# Altium PCB PCB_v0.2.pcbdoc
Units mil, origin at the board's own origin, x right, y up, seen from the top; angles counter-clockwise.
Board outline 2191.1 x 5080.87 mil, 2 copper layers (Top Layer, Bottom Layer); 17 components, 49 nets, 89 pads, 15 vias.
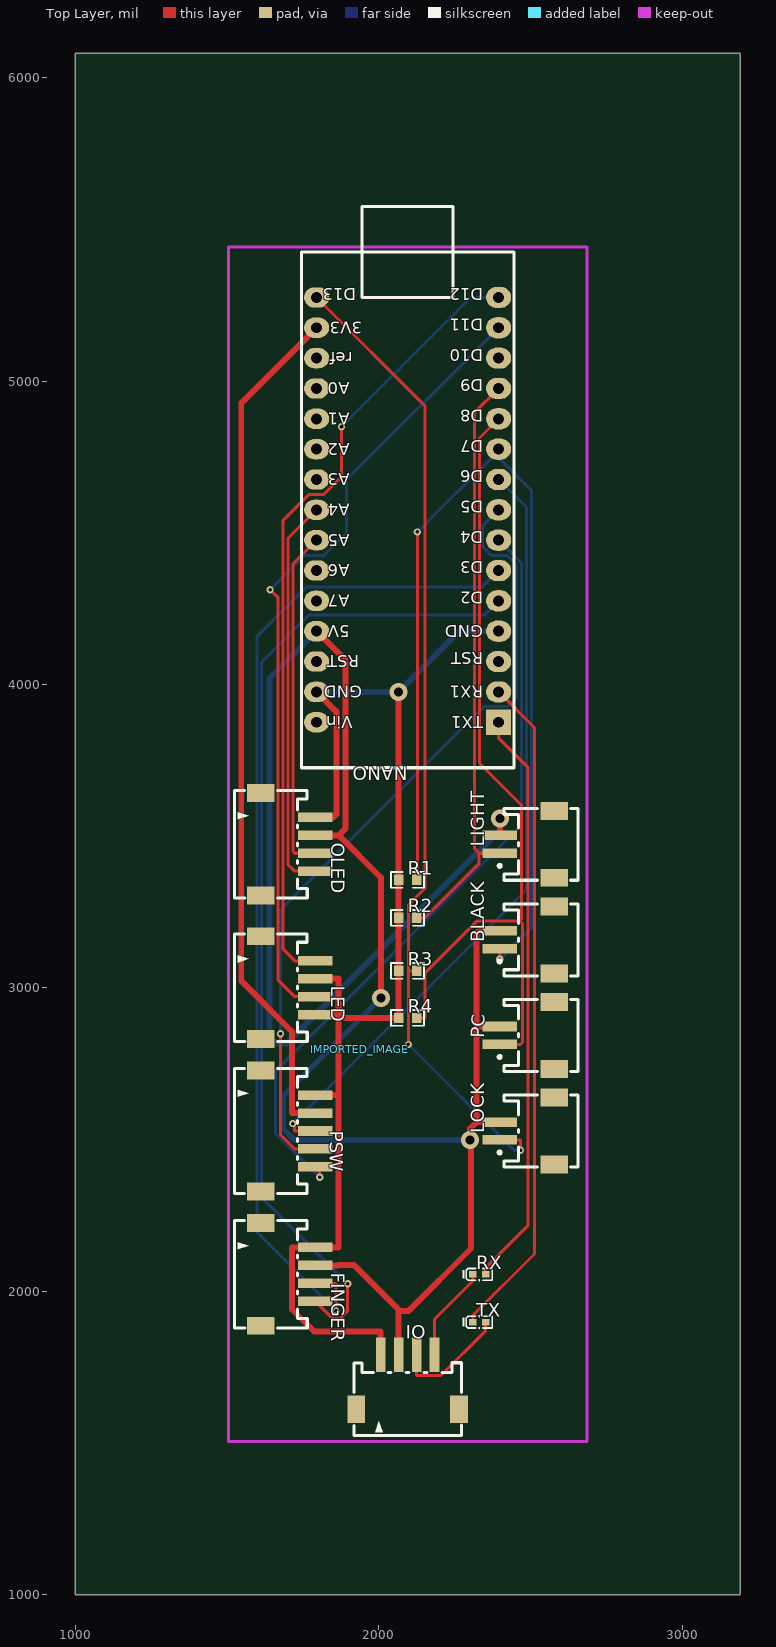
[diagram p0: Top Layer view]
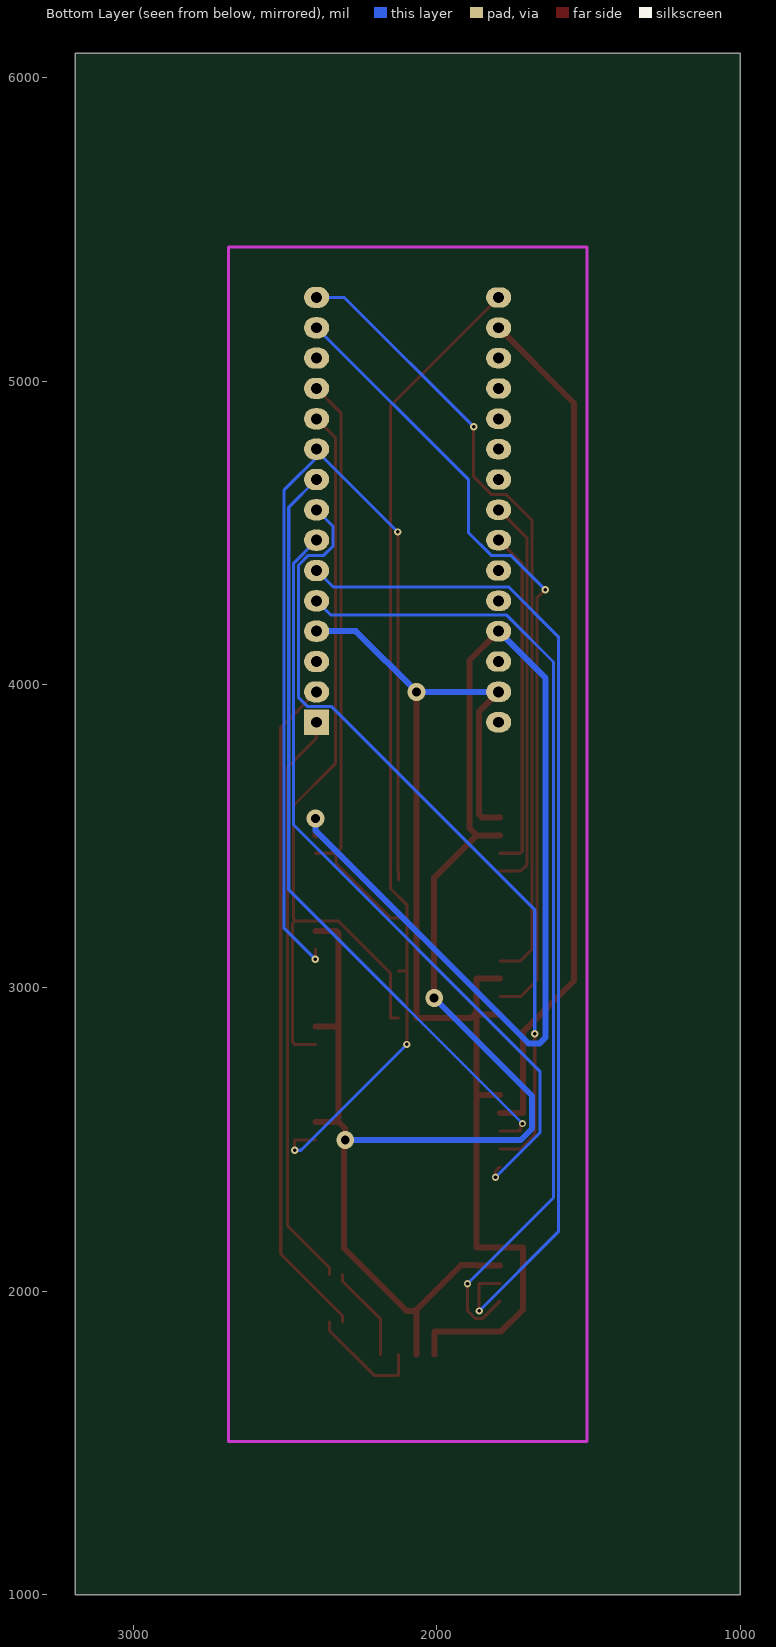
[diagram p1: Bottom Layer view, seen from below]

## Layer stack, top to bottom
Top Layer: signal copper (thickness not stored)
Dielectric: dielectric 12.6, FR-4, Dk 4.8
Bottom Layer: signal copper (thickness not stored)

## Board outline
3191.1,1000 1000,1000 1000,6080.87 3191.1,6080.87

## Components (designator, comment, footprint, x,y, rotation, side; value= is the part's Value field where it differs from the comment)
BLACK "ZH1.5-2P-WT 黑暗模式" CONN-SMD_ZH1.5-2P-WT 2489.25,3158.54 r90 top
FINGER "ZH1.5-4P-WT 指纹" CONN-TH_ZH1.5-4P-WT 1701.85,2056.18 r270 top
IMPORTED_IMAGE "IMPORTED_IMAGE" IMPORTED_IMAGE 1938.07,2798.2 r0 top
IO "ZH1.5-4P-WT IO" CONN-TH_ZH1.5-4P-WT 2095.55,1701.85 r0 top
LED "ZH1.5-4P-WT led" CONN-TH_ZH1.5-4P-WT 1701.85,3001.06 r270 top
LIGHT "ZH1.5-2P-WT 拨动开关" CONN-SMD_ZH1.5-2P-WT 2489.25,3473.5 r90 top
LOCK "ZH1.5-2P-WT 锁" CONN-SMD_ZH1.5-2P-WT 2489.25,2528.62 r90 top
NANO "ArduinoNano 蓝版" "ARDUINO NANO VINCENT" 2095.55,4575.87 r180 top
OLED "ZH1.5-4P-WT 0.96 OLED" CONN-TH_ZH1.5-4P-WT 1701.85,3473.5 r270 top
PC "ZH1.5-2P-WT 电脑" CONN-SMD_ZH1.5-2P-WT 2489.25,2843.58 r90 top
PSW "ZH1.5-5P-WT 密码" CONN-SMD_ZH1.5-5P-WT 1701.85,2528.62 r270 top
R1 "10K" R0603 2095.55,3356.26 r0 top
R2 "10K" R0603 2095.55,3231.26 r0 top
R3 "10K" R0603 2095.55,3056.26 r0 top
R4 "10K" R0603 2095.55,2901.26 r0 top
RX "TJ-S1005SW4TGLC6B-A5" LED0402-RD_BLUE 2331.77,2056.18 r0 top
TX "TJ-S1005SW4TGLC6B-A5" LED0402-RD_BLUE 2331.77,1898.7 r0 top

## Footprints (in the part's own frame and the unit in brackets; to place one, negate y for a bottom-side part, rotate by r counter-clockwise, add the part's x,y. Pads: shape width x height; smd on the part's side, far side on the other; paste and mask are expansions set on the pad)
"ARDUINO NANO VINCENT" [mm]
  rect 2.1x2.1 hole 0.914: 1(-7.62,17.78)
  oval 2.1x1.778 hole 0.914: 2(-7.62,15.24) 3(-7.62,12.7) 4(-7.62,10.16) 5(-7.62,7.62) 6(-7.62,5.08) 7(-7.62,2.54) 8(-7.62,0) 9(-7.62,-2.54) 10(-7.62,-5.08) 11(-7.62,-7.62) 12(-7.62,-10.16) 13(-7.62,-12.7) 14(-7.62,-15.24) 15(-7.62,-17.78)
  oval 2.1x1.7 hole 0.914: 16(7.62,-17.78) 17(7.62,-15.24) 18(7.62,-12.7) 19(7.62,-10.16) 20(7.62,-7.62) 21(7.62,-5.08) 22(7.62,-2.54) 23(7.62,0) 24(7.62,2.54) 25(7.62,5.08) 26(7.62,7.62) 27(7.62,10.16) 28(7.62,12.7) 29(7.62,15.24) 30(7.62,17.78)
  silkscreen extent -8.89,-25.4 8.89,21.59
CONN-SMD_ZH1.5-2P-WT [mm]
  rect 0.8x2.9 smd: 1(-0.75,2.275) 2(0.75,2.275)
  rect 1.5x2.3 smd: 3(-2.8,-2.275) 4(2.8,-2.275)
  silkscreen extent -3.01,-4.27 3,2.42
CONN-SMD_ZH1.5-5P-WT [mm]
  rect 0.8x2.9 smd: 1(-3,2.275) 2(-1.5,2.275) 3(0,2.275) 4(1.5,2.275) 5(3,2.275)
  rect 1.5x2.3 smd: 6(5.05,-2.275) 7(-5.05,-2.275)
  silkscreen extent -5.25,-4.48 5.25,1.57
CONN-TH_ZH1.5-4P-WT [mm]
  rect 0.8x2.9 smd: 1(-2.25,2.275) 2(-0.75,2.275) 3(0.75,2.275) 4(2.25,2.275)
  rect 1.5x2.3 smd: 5(4.3,-2.275) 6(-4.3,-2.275)
  silkscreen extent -4.5,-4.48 4.51,1.6
IMPORTED_IMAGE [mil]
LED0402-RD_BLUE [mm]
  rect 0.636x0.54 smd: 1(-0.538,0) 2(0.538,0)
  silkscreen extent -1.39,-0.54 1.09,0.54
R0603 [mil]
  rect 31.75x34.02 smd: 1(-29.65,0) 2(29.66,0)
  silkscreen extent -55,-26 55,26

## Via types
v1: diameter 24.02, hole 12.01, Top Layer to Bottom Layer, 11 vias
v2: diameter 59.06, hole 29.53, Top Layer to Bottom Layer, 4 vias

## Nets (pads, with @x,y where several pads share a name; then routed paths per layer and width w, separated by ;. In a path a pad name is that pad's centre, name@x,y a point inside that pad or via, vN(x,y) a via of type N, cw(c..) or ccw(c..) an arc to the next point about the centre after c; other vN are vias at no path point)
CN1_5: FINGER.5
CN1_6: FINGER.6
CN2_6: PSW.6
CN2_7: PSW.7
CN3_5: LED.5
CN3_6: LED.6
CN4_3: LOCK.3
CN4_4: LOCK.4
CN5_3: LIGHT.3
CN5_4: LIGHT.4
CN6_3: BLACK.3
CN6_4: BLACK.4
CN7_5: OLED.5
CN7_6: OLED.6
CN8_3: PC.3
CN8_4: PC.4
CN9_3: IO.3 TX.2 | length 385.2
  Top Layer w10: IO.3 2125.08,1723.26 2205.61,1723.26 2352.96,1870.61 TX.2
CN9_4: IO.4 RX.1 | length 317.1
  Top Layer w10: IO.4 2184.14,1908.04 2310.58,2034.48 RX.1
CN9_5: IO.5
CN9_6: IO.6
GND: FINGER.1 IO.1 LED.2 LED.4 NANO.4 NANO.29 OLED.1 PSW.1 R1.1 R2.1 R3.1 R4.1 | length 4343
  Top Layer w19.68: PSW.1 1868.2,2646.74 ; LED.4 1860.82,2912.48 ; LED.2 1868.2,3030.59 1868.2,2919.86 ; OLED.1 1850.34,3562.09 1860.82,3572.57 1860.82,3910.6 NANO.29 ; IO.1 2006.97,1868.2 1786.92,1868.2 1714.64,1940.48 1714.64,2144.77 FINGER.1 1868.2,2144.77 1868.2,2646.74 ; v2(2065.89,3975.87) R1.1 R2.1 R3.1 R4.1 2030.33,2901.26 1886.8,2901.26 1868.2,2919.86 ; 1860.82,2912.48 1868.2,2919.86 ; 1860.82,2912.48 1868.2,2912.48 1868.2,2646.74
  Bottom Layer w19.68: NANO.29 v2(2065.89,3975.87) 2265.89,4175.87 NANO.4
U1_1: NANO.1 RX.2 | length 1917
  Top Layer w10: RX.2 2352.96,2077.88 2491.69,2216.61 2491.69,3727.32 2395.55,3823.46 NANO.1
U1_2: NANO.2 TX.1 | length 2210.2
  Top Layer w10: TX.1 2310.58,1920.4 2513.65,2123.47 2513.65,3857.77 NANO.2
U1_3: NANO.3
U1_5: FINGER.4 NANO.5 | length 3261.5
  Top Layer w10: FINGER.4 1849.05,1909.97 1872.08,1909.97 1898.2,1936.09 v1(1898.2,2025.26)
  Bottom Layer w10: v1(1898.2,2025.26) 1614.76,2308.7 1614.76,4074.58 1768.74,4228.56 2348.24,4228.56 NANO.5
U1_6: FINGER.3 NANO.6 | length 3376.5
  Top Layer w10: FINGER.3 1859.58,2026.66 v1(1859.58,1935.65)
  Bottom Layer w10: v1(1859.58,1935.65) 1598.67,2196.56 1598.67,4157.65 1762.97,4321.95 2341.63,4321.95 NANO.6
U1_7: NANO.7 PSW.5 | length 2568.1
  Top Layer w10: PSW.5 1805.8,2396.14 v1(1805.8,2376.06)
  Bottom Layer w10: v1(1805.8,2376.06) 1659.77,2522.09 1659.77,2725.5 2471.19,3536.92 2471.19,4400.23 NANO.7
U1_8: NANO.8 PSW.4 | length 2661.7
  Top Layer w10: v1(1676.5,2849.52) 1676.5,2516.33 1723.26,2469.57 PSW.4
  Bottom Layer w10: v1(1676.5,2849.52) 1676.5,3257.47 2347.32,3928.29 2426.5,3928.29 2454.74,3956.53 2454.74,4393.91 2422.78,4425.87 2371.66,4425.87 2341.63,4455.9 2341.63,4521.95 NANO.8
U1_9: NANO.9 PSW.3 | length 2575
  Top Layer w10: v1(1717.03,2553.06) 1723.26,2546.83 1723.26,2528.63 PSW.3
  Bottom Layer w10: v1(1717.03,2553.06) 2487.28,3323.31 2487.28,4584.14 NANO.9
U1_10: BLACK.1 NANO.10 R1.2 | length 3323.7
  Top Layer w10: R1.2 2125.21,3384.34 2127.61,3386.74 v1(2127.61,4503.13) ; v1(2399.69,3094.39) BLACK.1
  Bottom Layer w10: v1(2127.61,4503.13) NANO.10@2383.95,4759.47 ; NANO.10 2383.95,4764.27 NANO.10@2383.95,4759.47 ; v1(2399.69,3094.39) 2503.37,3198.07 2503.37,4640.05 NANO.10@2383.95,4759.47
U1_11: NANO.11 PC.1 R4.2 | length 2781.6
  Top Layer w10: R4.2 2152.15,2901.26 2152.15,3048.3 2325.07,3221.22 2465.78,3221.22 ; NANO.11 2332.46,4812.78 2332.46,3740.31 2471.66,3601.11 2471.66,3227.1 2465.78,3221.22 ; PC.1 2467.85,2814.07 2474.31,2820.53 2474.31,3212.69 2465.78,3221.22
U1_12: LIGHT.1 NANO.12 R2.2 | length 1953.8
  Top Layer w10: R2.2 2152.15,3231.26 2331.53,3410.64 2331.53,3443.99 ; NANO.12 2315.5,4895.82 2315.5,3460.02 2331.53,3443.99 ; LIGHT.1 2331.53,3443.99
U1_13: NANO.13
U1_14: LED.3 NANO.14 | length 2656.1
  Top Layer w10: v1(1642.34,4312.89) 1669.01,4286.22 1669.01,3025.79 1723.26,2971.54 LED.3
  Bottom Layer w10: v1(1642.34,4312.89) 1755.32,4425.87 1820.33,4425.87 1894.31,4499.85 1894.31,4674.63 NANO.14
U1_15: LED.1 NANO.15 | length 2646.3
  Top Layer w10: LED.1 1723.26,3089.65 1685.5,3127.41 1685.5,4541.62 1769.75,4625.87 1818.64,4625.87 1877.8,4685.03 v1(1877.8,4849.51)
  Bottom Layer w10: v1(1877.8,4849.51) 2304.16,5275.87 NANO.15
U1_16: LOCK.1 NANO.16 R3.2 | length 3275
  Top Layer w10: NANO.16 2152.16,4919.26 2152.16,3328.18 2098.26,3274.28 2098.26,3056.26 ; v1(2098.26,2814.03) 2098.26,3056.26 ; R3.2 2098.26,3056.26 ; LOCK.1 2467.85,2499.1 v1(2467.85,2465.18)
  Bottom Layer w10: v1(2098.26,2814.03) 2447.11,2465.18 v1(2467.85,2465.18)
U1_18: NANO.18
U1_19: NANO.19
U1_20: NANO.20
U1_21: NANO.21
U1_22: NANO.22
U1_23: NANO.23 OLED.4 | length 1307
  Top Layer w10: OLED.4 1723.26,3384.92 1701.6,3406.58 1701.6,4481.92 NANO.23
U1_24: NANO.24 OLED.3 | length 1134.6
  Top Layer w10: OLED.3 1723.26,3443.98 1717.69,3449.55 1717.69,4398.01 NANO.24
U1_25: NANO.25
U1_26: NANO.26
U1_28: NANO.28
U1_30: NANO.30
VCC: BLACK.2 FINGER.2 IO.2 LIGHT.2 LOCK.2 NANO.27 OLED.2 PC.2 | length 7304.4
  Top Layer w19.68: FINGER.2 1868.2,2085.71 ; OLED.2 1868.2,3503.03 ; NANO.27 1891.57,4079.85 1891.57,3526.4 1868.2,3503.03 ; 1868.2,2086.26 1919.41,2086.26 2066.03,1939.64 IO.2 2066.03,1860.82 ; v2(2007.81,2967.11) 2007.81,3363.42 1868.2,3503.03 ; 2066.03,1935.94 2099.09,1935.94 2304.41,2141.26 2304.41,2494.93 v2(2301,2498.34) 2301,2536.24 2322.91,2558.15 ; LOCK.2@2399.69,2558.15 2322.91,2558.15 ; PC.2 2322.91,2873.12 ; BLACK.2 2330.3,3188.08 2322.91,3180.69 2322.91,2873.12 ; LIGHT.2 v2@2399.69,3558.55 ; 2322.91,2558.15 2322.91,2873.12
  Bottom Layer w19.68: NANO.27 1640.33,4020.65 1640.33,2837.58 1660.6,2817.31 1697.28,2817.31 2399.69,3519.72 v2@2399.69,3558.55 ; v2(2007.81,2967.11) 1684.83,2644.13 1684.83,2536.78 1723.27,2498.34 v2(2301,2498.34)
  other v2: 2399.69,3558.55
VEE: NANO.17 PSW.2 | length 2837.1
  Top Layer w19.68: PSW.2 1714.64,2587.68 1714.64,2856.22 1547.31,3023.55 1547.31,4927.63 NANO.17

## Silkscreen, mask and mechanical layers (free items; w line width, h text height)
Top Solder:
  text "by:TNTInMinecraft" at 2529.41,2331.26 h80 r270

## Text inside footprints (layer, text, board x,y; h text height)
NANO: Top Overlay "TX1" at 2345.55,3895.87 h40 r180; Top Overlay "GND" at 1945.55,3995.87 h40 r180; Top Overlay "5V" at 1905.55,4195.87 h40 r180; Top Overlay "D12" at 2345.55,5305.87 h40 r180; Top Overlay "Vin" at 1915.55,3895.87 h40 r180; Top Overlay "D13" at 1925.55,5305.87 h40 r180; Top Overlay "GND" at 2345.55,4195.87 h40 r180; Top Overlay "RX1" at 2345.55,3995.87 h40 r180; Top Overlay "RST" at 2345.55,4105.87 h40 r180; Top Overlay "D2" at 2345.55,4305.87 h40 r180; Top Overlay "D3" at 2345.55,4405.87 h40 r180; Top Overlay "D4" at 2345.55,4505.87 h40 r180; Top Overlay "D5" at 2345.55,4605.87 h40 r180; Top Overlay "D6" at 2345.55,4705.87 h40 r180; Top Overlay "D7" at 2345.55,4805.87 h40 r180; Top Overlay "D8" at 2345.55,4905.87 h40 r180; Top Overlay "D9" at 2345.55,5005.87 h40 r180; Top Overlay "D10" at 2345.55,5105.87 h40 r180; Top Overlay "D11" at 2345.55,5205.87 h40 r180; Top Overlay "3V3" at 1945.55,5195.87 h40 r180; Top Overlay "ref" at 1915.55,5095.87 h40 r180; Top Overlay "A0" at 1905.55,4995.87 h40 r180; Top Overlay "A1" at 1905.55,4895.87 h40 r180; Top Overlay "A2" at 1905.55,4795.87 h40 r180; Top Overlay "A3" at 1905.55,4695.87 h40 r180; Top Overlay "A4" at 1905.55,4595.87 h40 r180; Top Overlay "A5" at 1905.55,4495.87 h40 r180; Top Overlay "A6" at 1905.55,4395.87 h40 r180; Top Overlay "A7" at 1905.55,4295.87 h40 r180; Top Overlay "RST" at 1935.55,4095.87 h40 r180